# Altium PCB Encoder_BR.pcbdoc
Units mil, origin at the board's own origin, x right, y up, seen from the top; angles counter-clockwise.
Board outline 4000 x 2100 mil, 3 copper layers (Top Layer, Mid-Layer 1, Bottom Layer); 20 components, 77 nets, 126 pads, 4 vias.
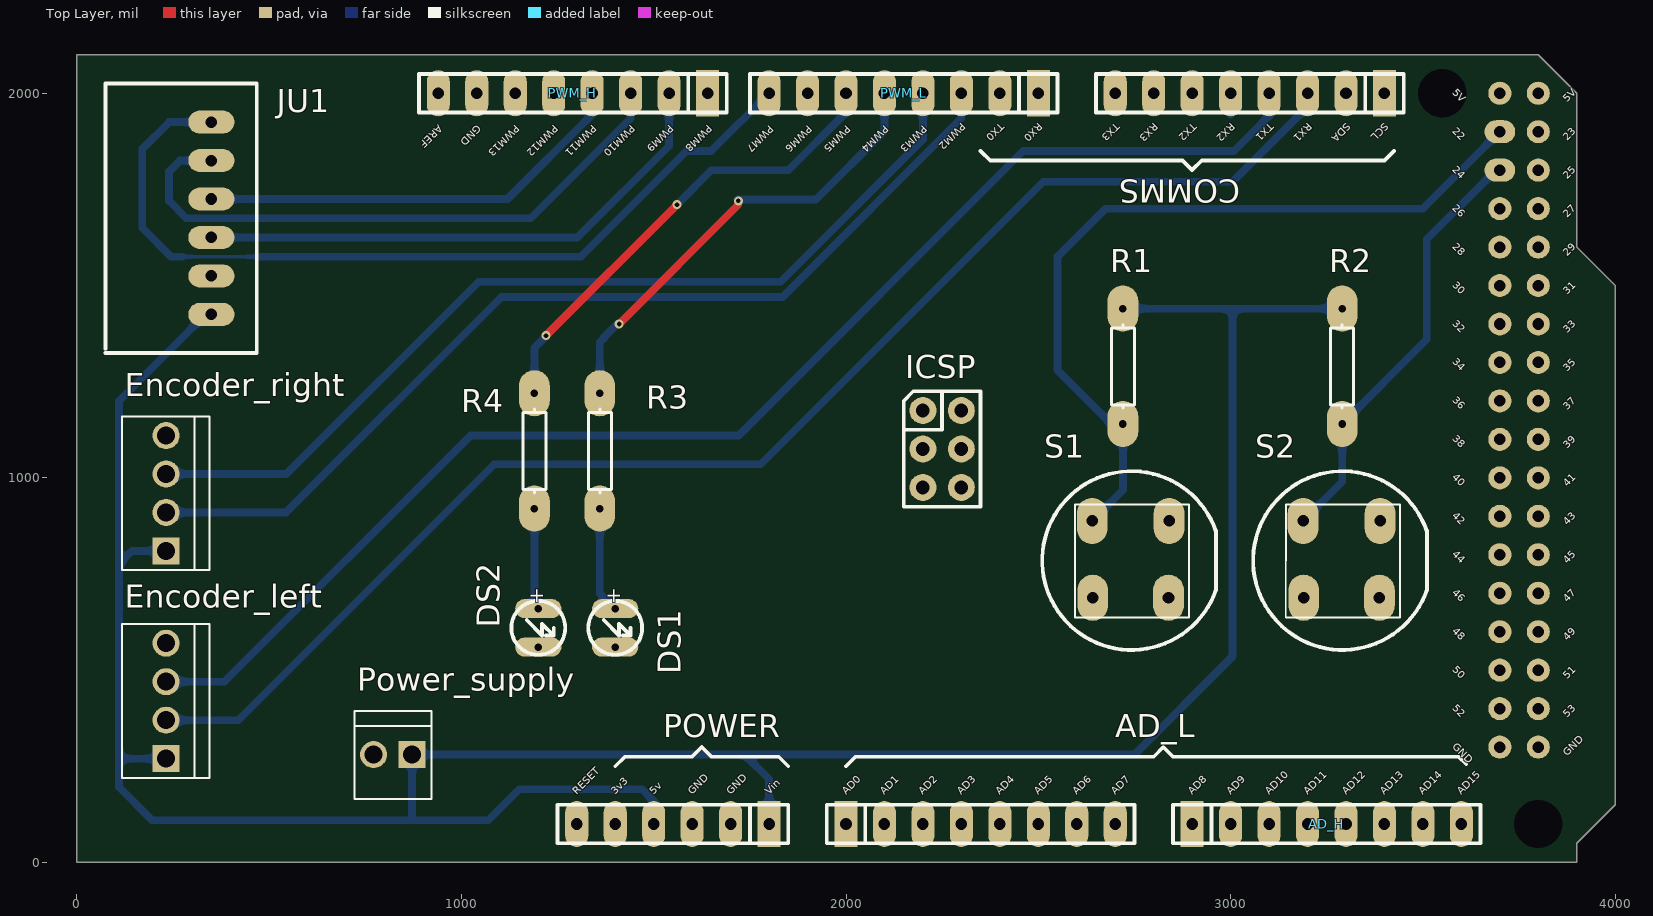
[diagram p0: Top Layer view]
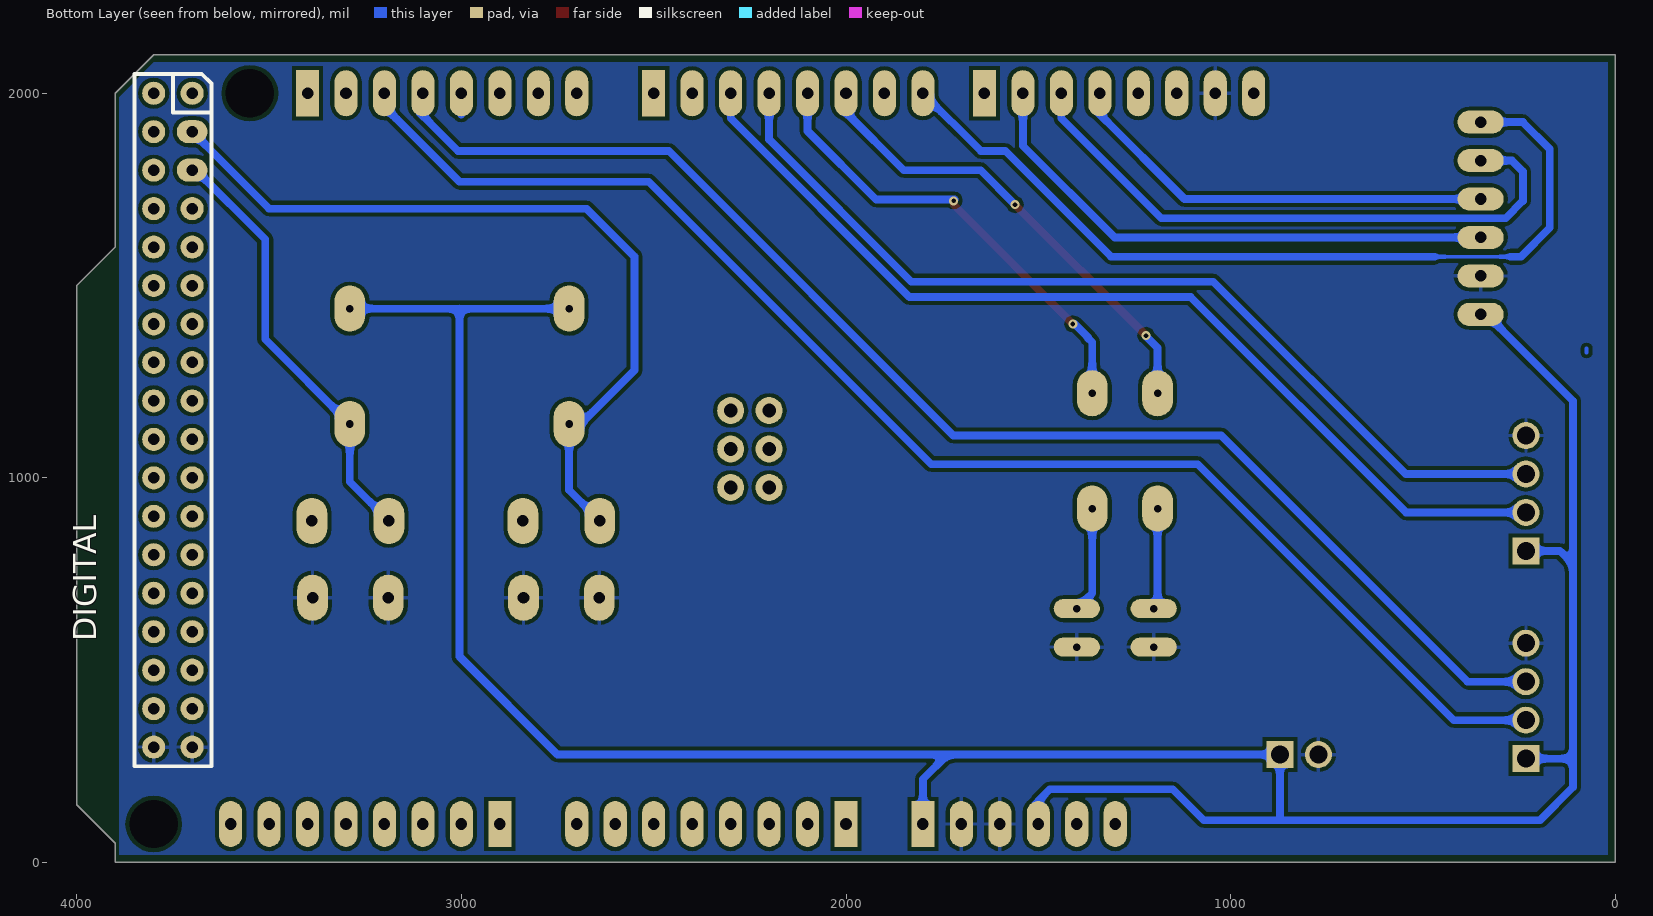
[diagram p1: Bottom Layer view, seen from below]
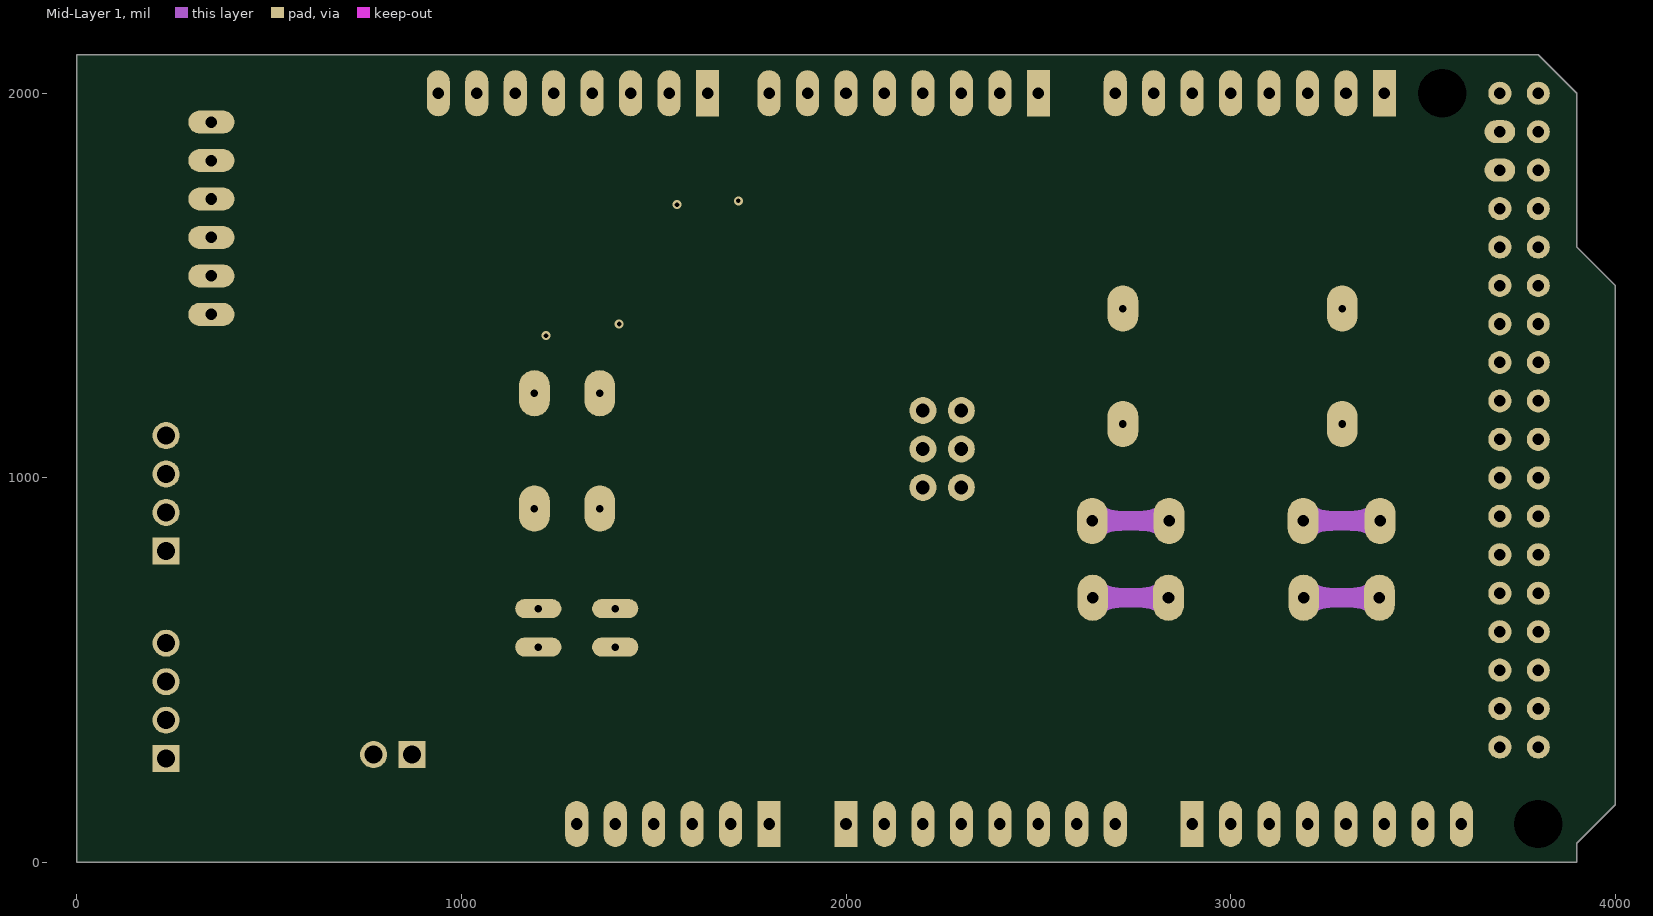
[diagram p2: Mid-Layer 1]

## Layer stack, top to bottom
Top Solder: solder mask 0.4, Solder Resist, Dk 3.5
Top Layer: signal copper 1.4
Dielectric1: dielectric 12.6, FR-4, Dk 4.8
Mid-Layer 1: signal copper 1.4
Dielectric2: dielectric 12.6, FR-4, Dk 4.8
Bottom Layer: signal copper 1.4
Bottom Solder: solder mask 0.4, Solder Resist, Dk 3.5

## Board outline
0,0 0,2100 3800,2100 3900,2000 3900,1600 4000,1500 4000,150 3900,50 3900,0

## Design rules (kind name [scope] priority, off if disabled: settings)
Clearance [All] p1: gap=10 ignorepadtopadclearanceinfootprint=FALSE except(0: Arc-Hole Track-Hole SMDPad-Hole THPad-Hole Via-Hole Fill-Hole Poly-Hole Region-Hole Text-Hole)
PolygonConnect [All] p1: connectstyle=Relief reliefconductorwidth=10 reliefentries=4 polygonreliefangle="90 Angle" airgapwidth=10
RoutingVias [All] p1: holewidth=28 width=50 viastyle="Through Hole" minholewidth=28 minwidth=50 maxholewidth=28 maxwidth=50
SilkToSolderMaskClearance SilkscreenOverComponentPads [IsPad] p1: minsilkscreentomaskgap=10 clearancetoexposedcopper=TRUE
SolderMaskExpansion [All] p1: expansion=4
Width [All] p1: maxlimit=20 minlimit=10 preferedwidth=20
29 further rules are at their usual default settings.

## Components (designator, comment, footprint, x,y, rotation, side; value= is the part's Value field where it differs from the comment)
AD_H "AD_H" "Header 8x1 8.5mm" 2900,100 r0 top locked
AD_L "AD_L" "Header 8x1 8.5mm" 2000,100 r0 top locked
COMMS "Communication" "Header 8x1 8.5mm" 3400,2000 r180 top
DIGITAL "IO_36" "HEADER 36X 8MM" 3700,2000 r270 bottom
DS1 "LED" "LED 0.1" 1400,660 r270 top
DS2 "LED" "LED 0.1" 1200,660 r270 top
Encoder_left "Header 4" Header_4 231.41,620 r270 top
Encoder_right "Header 4" Header_4 231.41,1160 r270 top
ICSP "ICSP" ICSP 2200,1175 r0 top
JU1 "conn_6" conn_6 468.11,1325 r90 top
POWER "POWER" "Header 6x1 8.5mm" 1800,100 r180 top locked
Power_supply "Connecteur 2" Header_2 721.78,279.71 r0 top
PWM_H "PWM_H" "Header 8x1 8.5mm" 1640,2000 r180 top locked
PWM_L "PWM_L" "Header 8x1 8.5mm" 2500,2000 r180 top locked
R1 "Résistance" AXIAL-0.3 2720,1140 r90 top
R2 "Résistance" AXIAL-0.3 3290,1140 r90 top
R3 "Résistance" AXIAL-0.3 1360,920 r90 top
R4 "Résistance" AXIAL-0.3 1190,920 r90 top
S1 "Bouton Poussoir D6" "BP-D6 SPST" 2838.5,688.24 r180 top
S2 "Bouton Poussoir D6" "BP-D6 SPST" 3387,688.24 r180 top

## Footprints (in the part's own frame and the unit in brackets; to place one, negate y for a bottom-side part, rotate by r counter-clockwise, add the part's x,y. Pads: shape width x height; smd on the part's side, far side on the other; paste and mask are expansions set on the pad)
AXIAL-0.3 [mil] "Resistor; 2 Leads"
  oval 120x80 hole 19.68: 1(0,0) 2(300,0)
  silkscreen extent 41,-30 259,30
"BP-D6 SPST" [mil] "SPST Momentary Key Switches"
  oval 80x120 hole 30: 1(0,0) 1(197,0) 2(-1.5,-200) 2(198.5,-200)
  Mid-Layer 1 lines w50: 198.5,-200 -1.5,-200 ; 197,0 0,0
  silkscreen extent -124,-329 328,136
conn_6 [mil]
  oval 60x120 hole 30: 1(100,118.11) 2(200,118.11) 3(300,118.11) 4(400,118.11) 5(500,118.11) 6(600,118.11)
  Bottom Layer lines w10: 1.3,393.7 11.3,393.7
  silkscreen extent 0,0 700,394
"Header 6x1 8.5mm" [mil] "Stackable 6 pin header"
  rect 60x120 hole 30: 1(0,0)
  oval 60x120 hole 30: 2(100,0) 3(200,0) 4(300,0) 5(400,0) 6(500,0)
  silkscreen extent -50,-50 550,50, body extent -50,-50 550,50, height 335
"Header 8x1 8.5mm" [mil] "Stackable 8 pin header"
  rect 60x120 hole 30: 1(0,0)
  oval 60x120 hole 30: 2(100,0) 3(200,0) 4(300,0) 5(400,0) 6(500,0) 7(600,0) 8(700,0)
  silkscreen extent -50,-50 750,50, body extent -50,-50 750,50, height 335
"HEADER 36X 8MM" [mil] "Stackable 10 pin header"
  round 60 hole 30: 1(0,0) 2(0,-100) 4(100,-100) 6(200,-100) 7(300,0) 8(300,-100) 9(400,0) 10(400,-100) 11(500,0) 12(500,-100) 13(600,0) 14(600,-100) 15(700,0) 16(700,-100) 17(800,0) 18(800,-100) 19(900,-100) 20(900,0) 21(1000,0) 22(1000,-100) 23(1100,0) 24(1100,-100) 25(1200,0) 26(1200,-100) 27(1300,0) 28(1300,-100) 29(1400,0) 30(1400,-100) 31(1500,0) 32(1500,-100) 33(1600,0) 34(1600,-100) 35(1700,0) 36(1700,-100)
  oval 60x80 hole 30: 3(100,0) 5(200,0)
  silkscreen extent -50,-150 1750,50, body extent -50,-150 1750,50, height 335
Header_2 [mm]
  rect 1.785x1.785 hole 1.19: 1(3.81,0.02)
  round 1.785 hole 1.19: 2(1.27,0.02)
  silkscreen extent 0,-2.9 5.08,2.9
Header_4 [mm]
  rect 1.785x1.785 hole 1.19: 1(8.89,0.02)
  round 1.785 hole 1.19: 2(6.35,0.02) 3(3.81,0.02) 4(1.27,0.02)
  silkscreen extent 0,-2.9 10.16,2.9
ICSP [mil]
  round 70 hole 35.43: 1(0,0) 2(100,0) 3(0,-100) 4(100,-100) 5(0,-200) 6(100,-200)
  silkscreen extent -50,-250 150,50, body extent -50,-250 150,50, height 485
"LED 0.1" [mil] "Led Verticale"
  oval 50x120 hole 19.68: 1(0,0) 2(100,0)
  silkscreen extent -20,-70 120,70

## Part data
AD_H PWM_L: Supplier Part Number 1=2698940, Supplier 1=Arrow, Supplier 2=Arrow, Supplier 3=Digi-Key, Supplier 4=Arrow, Supplier Part Number 2=2698939, Supplier Part Number 3=SAM1198-08-ND, Supplier Part Number 4=2698925
AD_L COMMS PWM_H: Supplier Part Number 1=SAM1198-08-ND, Supplier 1=Digi-Key, Supplier 2=Arrow, Supplier 3=Arrow, Supplier 4=Arrow
  AD_L: Supplier 5=Arrow, Supplier Part Number 2=2698939, Supplier Part Number 3=2698940, Supplier Part Number 4=43085273, Supplier Part Number 5=2698925
  COMMS PWM_H: Supplier Part Number 2=2698940, Supplier Part Number 3=2698939, Supplier Part Number 4=2698925
DIGITAL: Supplier Part Number 1=SAM1196-18-ND, Supplier 1=Digi-Key, Supplier 2=Arrow, Supplier 3=Arrow, Supplier 4=Arrow, Supplier 5=Arrow, Supplier Part Number 2=48117090, Supplier Part Number 3=46093326, Supplier Part Number 4=2698278, Supplier Part Number 5=2698268
DS1 DS2: Color=Rouge, Designer="ECAM 2004", Type=LED
Encoder_left Encoder_right: "Header, 4-Pin", LatestRevisionDate=17-Jul-2002, LatestRevisionNote="Re-released for DXP Platform.", Publisher="Altium Limited", Supplier="Farnell 9731164"
ICSP: Supplier Part Number 1=SAM1185-06-ND, Supplier 1=Digi-Key, Supplier 2=Arrow, Supplier 3=Arrow, Supplier 4=Arrow, Supplier 5=Digi-Key, Supplier Part Number 2=2699117, Supplier Part Number 3=43862781, Supplier Part Number 4=2699091, Supplier Part Number 5=SAM1196-06-ND
POWER: Supplier Part Number 1=52553843, Supplier 1=Arrow, Supplier 2=Arrow, Supplier 3=Digi-Key, Supplier 4=Arrow, Supplier 5=Arrow, Supplier Part Number 2=2699075, Supplier Part Number 3=SAM1198-06-ND, Supplier Part Number 4=2699089, Supplier Part Number 5=2699088
Power_supply: "Header 2", Designer="ECAM 2005", Supplier=ECAM, Type="Connecteur à vis"
R1 R2 R3 R4: "Résistance standard", Designer="ECAM 2005", Type="Résistance standard"
S1 S2: "Bouton poussoir", Color=Rouge, Manufacturer="ITT CANON", Designer="ECAM 2004", Supplier="Farnell 151-141", Type="SPST D6C-40"

## Free pads (board coordinates)
  round 62.99 hole 125.98: 0(3550,2000) 0(3800,100)

## Via types
v1: diameter 23.62, hole 11.81, Top Layer to Bottom Layer, 4 vias

## Nets (pads, with @x,y where several pads share a name; then routed paths per layer and width w, separated by ;. In a path a pad name is that pad's centre, name@x,y a point inside that pad or via, vN(x,y) a via of type N, cw(c..) or ccw(c..) an arc to the next point about the centre after c; other vN are vias at no path point)
3V3: POWER.5
5V: Encoder_left.1 Encoder_right.1 JU1.1 POWER.1 POWER.4 Power_supply.1 R1.2 R2.2 | length 7221.1
  Bottom Layer w20: Encoder_left.1 110,270 ; Encoder_right.1 144.42,810 110,775.58 ; JU1.1 335,1425 110,1200 110,775.58 ; POWER.4 1500,160 1469.94,190.06 1150.06,190.06 1070,110 865,110 ; POWER.1 1800,216.4 1735.91,280.5 ; R1.2 3005,1440 ; R2.2 3005,1440 ; 110,270 110,775.58 ; 110,270 110,195.58 195.58,110 865,110 ; 865,110 871.78,116.78 Power_supply.1 1735.91,280.5 ; 1735.91,280.5 2750.05,280.5 3005,535.44 3005,1440
AD0: AD_L.1
AD1: AD_L.2
AD2: AD_L.3
AD3: AD_L.4
AD4: AD_L.5
AD5: AD_L.6
AD6: AD_L.7
AD7: AD_L.8
AD8: AD_H.1
AD9: AD_H.2
AD10: AD_H.3
AD11: AD_H.4
AD12: AD_H.5
AD13: AD_H.6
AD14: AD_H.7
AD15: AD_H.8
AREF: PWM_H.8
GND: DIGITAL.35 DIGITAL.36 DS1.2 DS2.2 Encoder_left.4 Encoder_right.4 JU1.2 POWER.2 POWER.3 Power_supply.2 PWM_H.7 S1.1 S2.1
Green_left: COMMS.3 Encoder_left.2 | length 3663.4
  Bottom Layer w20: Encoder_left.2 420,370 1085.69,1035.69 1778.6,1035.69 2512.91,1770 3004.94,1770 3200,1965.06 COMMS.3
Green_right: Encoder_right.2 PWM_L.3 | length 2557.4
  Bottom Layer w20: Encoder_right.2 543.84,910 1103.84,1470 1835,1470 2300,1935 PWM_L.3
IO22: DIGITAL.3 R1.1 S1.2 | length 2092.7
  Bottom Layer w20: S1.2@2640,888.24 2720,968.24 R1.1 2690,1140 2550,1280 2550,1575.38 2674.62,1700 3500,1700 DIGITAL.3
IO23: DIGITAL.4
IO24: DIGITAL.5 R2.1 S2.2 | length 1129.5
  Bottom Layer w20: S2.2@3188.5,888.24 3290,989.74 R2.1 3510,1360 3510,1620 3690,1800 DIGITAL.5
IO25: DIGITAL.6
IO26: DIGITAL.7
IO27: DIGITAL.8
IO28: DIGITAL.9
IO29: DIGITAL.10
IO30: DIGITAL.11
IO31: DIGITAL.12
IO32: DIGITAL.13
IO33: DIGITAL.14
IO34: DIGITAL.15
IO35: DIGITAL.16
IO36: DIGITAL.17
IO37: DIGITAL.18
IO38: DIGITAL.19
IO39: DIGITAL.20
IO40: DIGITAL.21
IO41: DIGITAL.22
IO42: DIGITAL.23
IO43: DIGITAL.24
IO44: DIGITAL.25
IO45: DIGITAL.26
IO46: DIGITAL.27
IO47: DIGITAL.28
IO48: DIGITAL.29
IO49: DIGITAL.30
IO50: DIGITAL.31
IO51: DIGITAL.32
IO52: DIGITAL.33
IO53: DIGITAL.34
NetDS1_1: DS1.1 R3.1 | length 276.6
  Bottom Layer w20: R3.1 1360,700 DS1.1
NetDS2_1: DS2.1 R4.1 | length 264.1
  Bottom Layer w20: R4.1 1190,670 DS2.1
PWM4: PWM_L.5 R3.2 | length 1204.6
  Top Layer w20: v1(1410,1400) 1720,1710 v1(1720,1720)
  Bottom Layer w20: R3.2 1360,1352.73 1372.27,1365 1370,1365 v1@1405,1400 ; v1@1717.65,1723.5 1921.65,1723.5 2100,1901.85 PWM_L.5
PWM5: PWM_L.6 R4.2 | length 1232.7
  Top Layer w20: v1(1220,1370) v1(1560.58,1710.58)
  Bottom Layer w20: R4.2 1190,1338.41 1220,1368.41 v1(1220,1370) ; v1(1560.58,1710.58) 1650,1800 1850,1800 2000,1950 PWM_L.6
PWM6: PWM_L.7
PWM7: JU1.6 PWM_L.8 | length 2251.1
  Bottom Layer w10: 272.87,1575 469.42,1575
  Bottom Layer w20: 272.87,1575 245,1575 170,1650 170,1855 240,1925 JU1.6 ; 469.42,1575 1310.8,1575 1585.8,1850 1650,1850 PWM_L.8
PWM8: PWM_H.1
PWM9: JU1.3 PWM_H.2 | length 1425.3
  Bottom Layer w20: JU1.3 1301.59,1625 1540,1863.41 PWM_H.2
PWM10: JU1.5 PWM_H.3 | length 1589.6
  Bottom Layer w20: JU1.5 268.53,1825 240,1796.47 240,1720 285,1675 1180,1675 1440,1935 PWM_H.3
PWM11: JU1.4 PWM_H.4 | length 1136.1
  Bottom Layer w20: JU1.4 1119.96,1725 1340,1945.04 PWM_H.4
PWM12: PWM_H.5
PWM13: PWM_H.6
RESET: POWER.6
RX0: PWM_L.1
RX2: COMMS.5 | length 55.3
  Bottom Layer w20: COMMS.5@3000,1944.71 COMMS.5
RX3: COMMS.7
SCL: COMMS.1
SDA: COMMS.2
TX0: PWM_L.2
TX2: COMMS.6
TX3: COMMS.8
Yellow_left: COMMS.4 Encoder_left.3 | length 3536.1
  Bottom Layer w20: Encoder_left.3 383.98,470 1023.98,1110 1721.07,1110 2461.07,1850 3008.97,1850 3100,1941.03 COMMS.4
Yellow_right: Encoder_right.3 PWM_L.4 | length 2448.4
  Bottom Layer w20: Encoder_right.3 545,1010 1045,1510 1830.35,1510 2200,1879.65 PWM_L.4
pads on no net: DIGITAL.1 DIGITAL.2 ICSP.1 ICSP.2 ICSP.3 ICSP.4 ICSP.5 ICSP.6

## Polygon pours and split planes (outlines as drawn)
GND on Top Layer "Top Layer-No Net" (solid, pour order 11): 3975,25
GND on Bottom Layer "Bottom Layer-GND" (solid, remove dead copper, pour order 13): 20,20 20,2080 3800,2080 3890,1990 3890,20

## Silkscreen, mask and mechanical layers (free items; w line width, h text height)
Top Overlay:
  lines w10: 1400,250 1425,275 1600,275 1625,300 1650,275 1825,275 1850,250 ; 2000,250 2025,275 2800,275 2825,300 2850,275 3592.93,275 3612.7,255.23 ; 2350,1850 2375,1825 2875,1825 2900,1800 2925,1825 3400,1825 3425,1850
  text "5V" at 3575,2000 h20 r315
  text "5V" at 3875,1975 h20 r45
  text "PWM2" at 2300,1925 h20 r225
  text "TX0" at 2400,1925 h20 r225
  text "RX0" at 2500,1925 h20 r225
  text "TX3" at 2700,1925 h20 r225
  text "RX3" at 2800,1925 h20 r225
  text "TX2" at 2900,1925 h20 r225
  text "RX2" at 3000,1925 h20 r225
  text "TX1" at 3100,1925 h20 r225
  text "RX1" at 3200,1925 h20 r225
  text "SDA" at 3300,1925 h20 r225
  text "SCL" at 3400,1925 h20 r225
  text "AREF" at 940,1920 h20 r225
  text "GND" at 1040,1920 h20 r225
  text "PWM13" at 1140,1920 h20 r225
  text "PWM12" at 1240,1920 h20 r225
  text "PWM11" at 1340,1920 h20 r225
  text "PWM10" at 1440,1920 h20 r225
  text "PWM9" at 1540,1920 h20 r225
  text "PWM8" at 1640,1920 h20 r225
  text "PWM7" at 1800,1917.93 h20 r225
  text "PWM6" at 1900,1917.93 h20 r225
  text "PWM5" at 2000,1917.93 h20 r225
  text "PWM4" at 2100,1917.93 h20 r225
  text "PWM3" at 2200,1917.93 h20 r225
  text "22" at 3575,1900 h20 r315
  text "23" at 3875,1875 h20 r45
  text "24" at 3575,1800 h20 r315
  text "25" at 3875,1775 h20 r45
  text "26" at 3575,1700 h20 r315
  text "27" at 3875,1675 h20 r45
  text "28" at 3575,1600 h20 r315
  text "29" at 3875,1575 h20 r45
  text "30" at 3575,1500 h20 r315
  text "31" at 3875,1475 h20 r45
  text "32" at 3575,1400 h20 r315
  text "33" at 3875,1375 h20 r45
  text "34" at 3575,1300 h20 r315
  text "35" at 3875,1275 h20 r45
  text "36" at 3575,1200 h20 r315
  text "37" at 3875,1175 h20 r45
  text "38" at 3575,1100 h20 r315
  text "39" at 3875,1075 h20 r45
  text "40" at 3575,1000 h20 r315
  text "41" at 3875,975 h20 r45
  text "42" at 3575,900 h20 r315
  text "43" at 3875,875 h20 r45
  text "44" at 3575,800 h20 r315
  text "45" at 3875,775 h20 r45
  text "46" at 3575,700 h20 r315
  text "47" at 3875,675 h20 r45
  text "48" at 3575,600 h20 r315
  text "49" at 3875,575 h20 r45
  text "50" at 3575,500 h20 r315
  text "51" at 3875,475 h20 r45
  text "52" at 3575,400 h20 r315
  text "53" at 3875,375 h20 r45
  text "GND" at 3575,300 h20 r315
  text "GND" at 3875,275 h20 r45
  text "RESET" at 1300,175 h20 r45
  text "3v3" at 1400,175 h20 r45
  text "5v" at 1500,175 h20 r45
  text "GND" at 1600,175 h20 r45
  text "GND" at 1700,175 h20 r45
  text "Vin" at 1800,175 h20 r45
  text "AD0" at 2000,175 h20 r45
  text "AD1" at 2100,175 h20 r45
  text "AD2" at 2200,175 h20 r45
  text "AD3" at 2300,175 h20 r45
  text "AD4" at 2400,175 h20 r45
  text "AD5" at 2500,175 h20 r45
  text "AD6" at 2600,175 h20 r45
  text "AD7" at 2700,175 h20 r45
  text "AD8" at 2900,175 h20 r45
  text "AD9" at 3000,175 h20 r45
  text "AD10" at 3100,175 h20 r45
  text "AD11" at 3200,175 h20 r45
  text "AD12" at 3300,175 h20 r45
  text "AD13" at 3400,175 h20 r45
  text "AD14" at 3500,175 h20 r45
  text "AD15" at 3600,175 h20 r45
Mechanical 1:
  circle w5: c3800,100 r62.99
  circle w5: c3550,2000 r62.99
  lines w5: 0,0 0,2100 3800,2100 3900,2000 3900,1600 4000,1500 4000,150 3900,50 3900,0 0,0

## Text inside footprints (layer, text, board x,y; h text height)
DS1: Top Overlay "+" at 1380,715 h39.37 r270
DS2: Top Overlay "+" at 1180,715 h39.37 r270